# Altium PCB nrf52832_qfaa_nfc.PcbDoc
Units mil, origin at the board's own origin, x right, y up, seen from the top; angles counter-clockwise.
Board outline 999.98 x 2997 mil, 2 copper layers (Top Layer, Bottom Layer), stack 65.8 mil thick; 21 components, 46 nets, 92 pads, 60 vias.
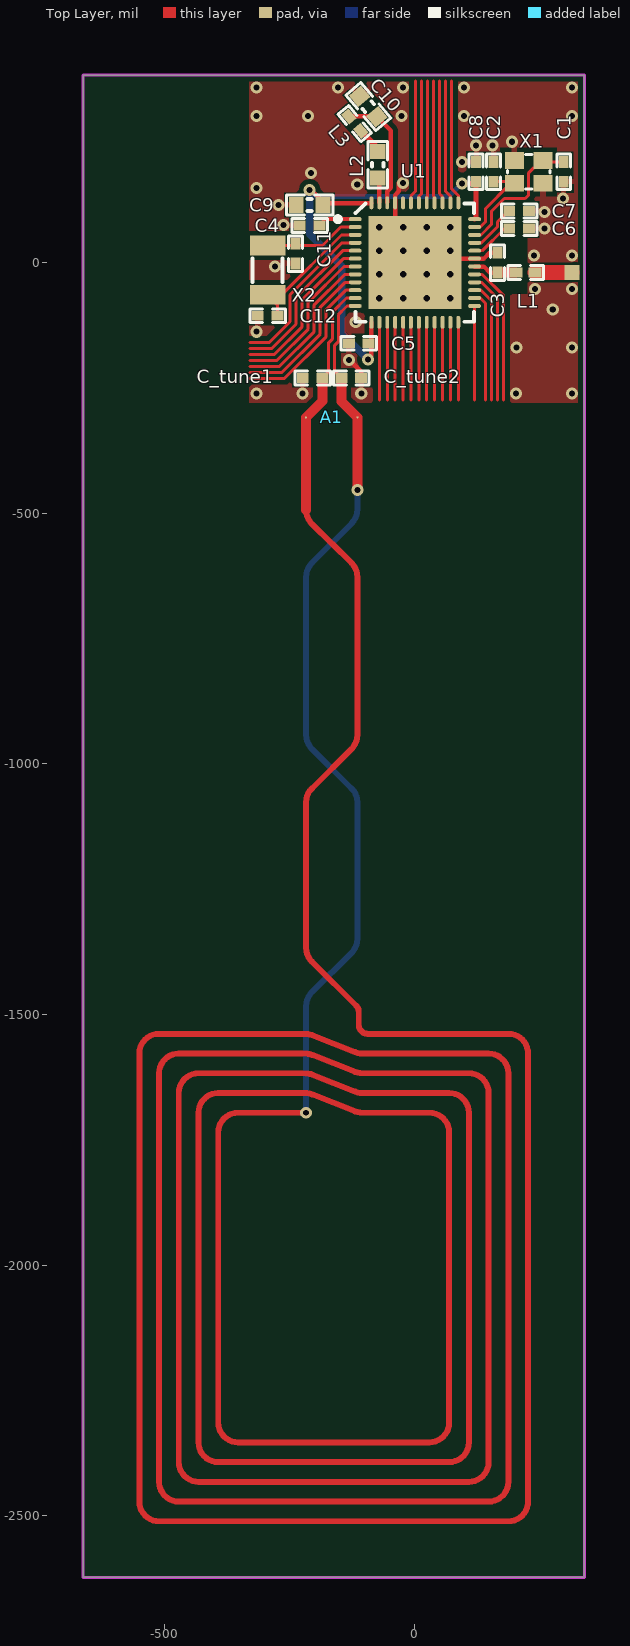
[diagram p0: Top Layer view]
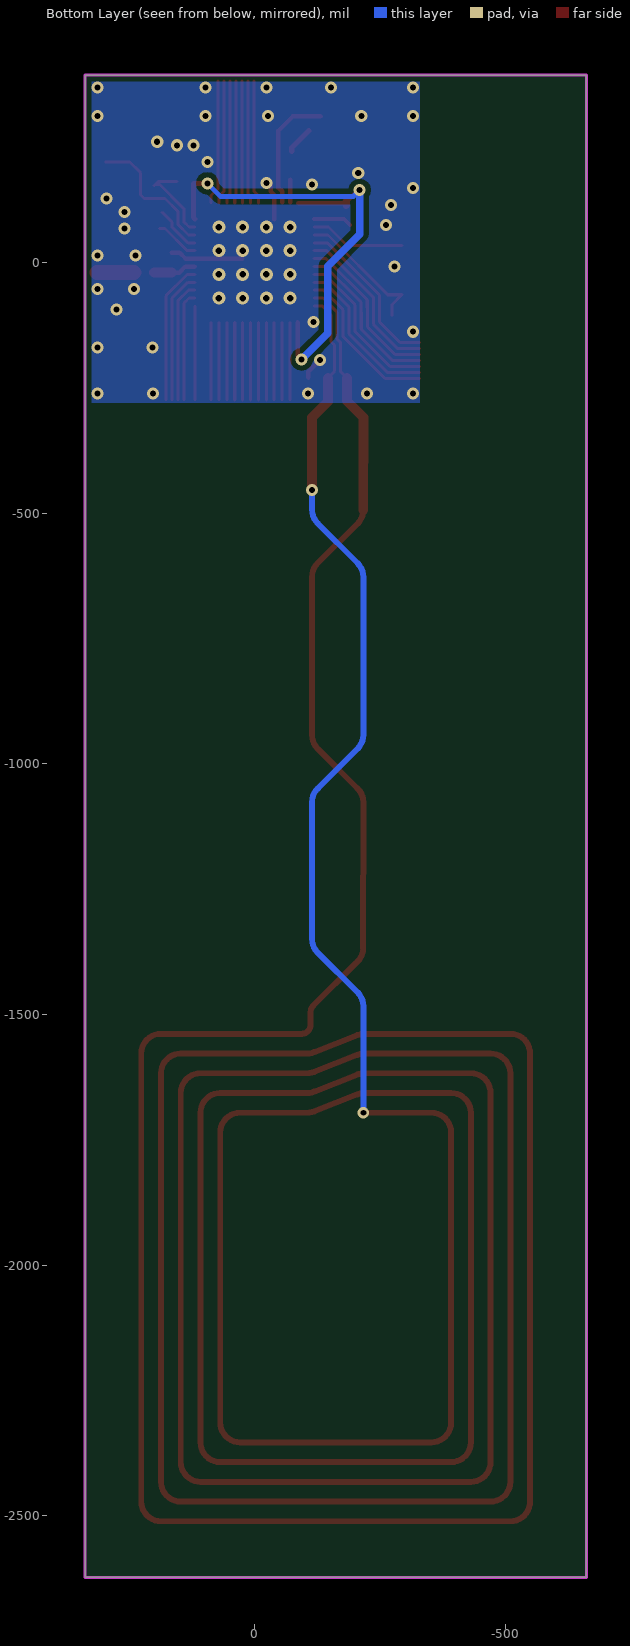
[diagram p1: Bottom Layer view, seen from below]
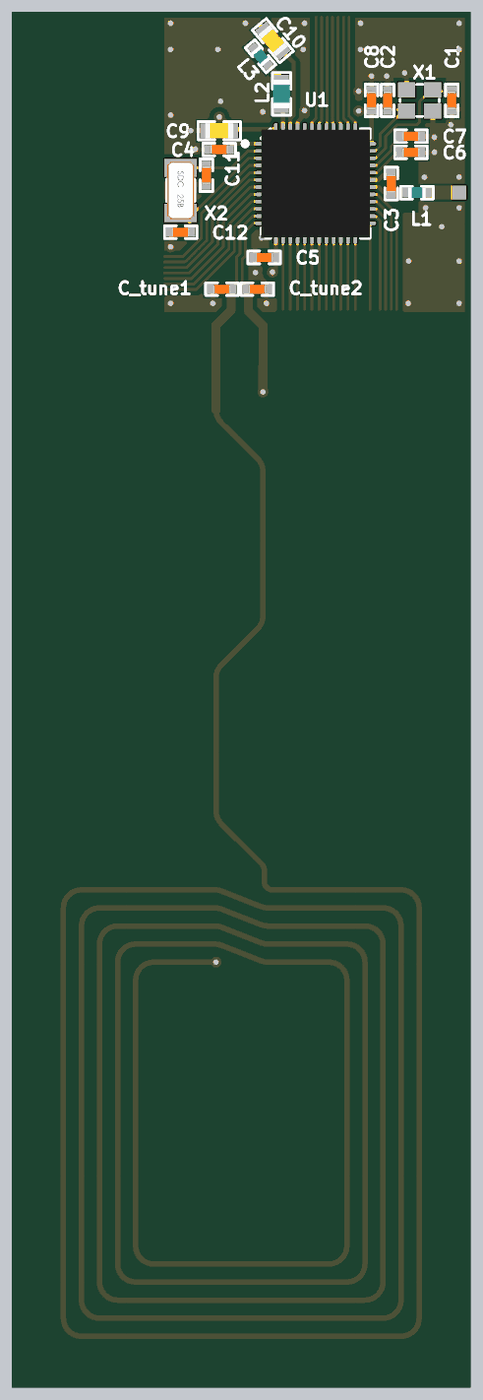
[diagram p2: 3D render of the assembled board from above, using the file's embedded part models]

## Layer stack, top to bottom
Top Solder: solder mask 0.4, Solder Resist, Dk 3.5
Top Layer: signal copper 1.4
Dielectric1: core 63, FR-4, Dk 4.8
Bottom Layer: signal copper 1.4
Bottom Solder: solder mask 0.4, Solder Resist, Dk 3.5

## Board outline
-662,-2623 337.98,-2623 337.98,374 -662,374

## Design rules (kind name [scope] priority, off if disabled: settings)
Clearance Polygon_ANT [(InNamedPolygon('Top_Layer-GND')) or (InNamedPolygon('Bottom_Layer-GND')) vs InNet('RF')] p1: gap=5
Clearance Polygon [(InNamedPolygon('Top_Layer-GND')) or (InNamedPolygon('Bottom_Layer-GND'))] p2: gap=10
Clearance [All] p3: gap=6
ComponentClearance [All] p1 off: gap=10 collisioncheckmode=3 verticalgap=10 showdistances=FALSE
FabricationTestPointUsage TestPointUsage [All] p1: valid=0 allowmultiple=FALSE
FabricationTestpoint Testpoint [All] p1: side=3 testpointundercomponent=TRUE minsize=40 maxsize=100 preferedsize=60 minholesize=0 maxholesize=40 preferedholesize=32 testpointgrid=1 allowsidetop=TRUE allowsidebottom=TRUE usegrid=TRUE gridtolerance=0.01
Height [All] p1 off: minheight=0 maxheight=1000 prefheight=500
HoleSize [All] p1: absolutevalues=TRUE maxlimit=160 minlimit=11.81 maxpercent=80.000 minpercent=20.000
MinimumAnnularRing [All] p1 off: minimumring=6
PolygonConnect PolygonConnect_1 [isVia and innet(gnd)] p1: connectstyle=Direct reliefconductorwidth=10 reliefentries=4 polygonreliefangle="90 Angle" airgapwidth=10
PolygonConnect [All] p2: connectstyle=Relief reliefconductorwidth=10 reliefentries=4 polygonreliefangle="90 Angle" airgapwidth=10
RoutingVias [All] p1: holewidth=16 width=32 viastyle="Through Hole" minholewidth=10 minwidth=10 maxholewidth=28 maxwidth=50
ShortCircuit ShortCircuit_NFC_ANT [InNet('NFC1') vs InNet('NFC2')] p1: allowed=TRUE
ShortCircuit [All] p2: allowed=FALSE
SilkToSolderMaskClearance SilkscreenOverComponentPads [IsPad] p1: minsilkscreentomaskgap=10 clearancetoexposedcopper=TRUE
SolderMaskExpansion [All] p1: expansion=3
Width [All] p1: maxlimit=100 minlimit=6 preferedwidth=6
23 further rules are at their usual default settings.

## Components (designator, comment, footprint, x,y, rotation, side; value= is the part's Value field where it differs from the comment)
A1 "NFC_ANT_Listener-6" NFC_ANT_Listener-6 -114.5,-309 r270 top
C1 "12pF" CAPC1005X04L 297,181 r270 top (schematic designator C7)
C2 "12pF" CAPC1005X04L 157,181 r90 top
C3 "0.8pF" CAPC1005X04L 165,0 r270 top (schematic designator C20)
C4 "100nF" CAPC1005X04L -210,74 r180 top (schematic designator C5)
C5 "100nF" CAPC1005X04L -112,-161 r180 top (schematic designator C6)
C6 "N.C." CAPC1005X04L 208,68 r180 top (schematic designator C8)
C7 "100pF" CAPC1005X04L 208,103 r0 top (schematic designator C11)
C8 "100nF" CAPC1005X04L 122,181 r90 top (schematic designator C12)
C9 "4.7µF" CAPC1608X06L -210,115 r180 top
C10 "1.0µF" CAPC1608X06L -92.97,311.2 r310 top (schematic designator C11)
C11 "12pF" CAPC1005X04L -238,18 r270 top
C12 "12pF" CAPC1005X04L -294,-106 r180 top
C_tune1 "TBD" CAPC1005X04L -204,-230 r180 top
C_tune2 "TBD" CAPC1005X04L -127,-230 r180 top
L1 "3.9nH" INDC1005X04L 221,-20 r0 top (schematic designator L2)
L2 "10µH" INDC1608X06L -74,195.2 r270 top (schematic designator L5)
L3 "15nH" INDC1005X04L -119.97,277.2 r310 top (schematic designator L6)
U1 "nRF52832-QFAA" QFN40P600X600X90-48N 0,0 r0 top locked
X1 "32MHz" BT-XTAL_2016 227,181 r180 top
X2 "32.768kHz" XTAL_3215 -294,-15 r270 top

## Footprints (in the part's own frame and the unit in brackets; to place one, negate y for a bottom-side part, rotate by r counter-clockwise, add the part's x,y. Pads: shape width x height; smd on the part's side, far side on the other; paste and mask are expansions set on the pad)
BT-XTAL_2016 [mm] "Crystal 2.0 x 1.6 mm"
  rect 0.95x0.85 smd: 1(-0.725,-0.575) 2(0.725,-0.575) 3(0.725,0.575) 4(-0.725,0.575)
  silkscreen extent -1.08,-0.88 1.08,0.88
CAPC1005X04L [mm] "Chip Capacitor, 2-Leads, Body 1.0x0.5mm, IPC High Density"
  rect 0.6x0.5 smd: 1(-0.5,0) 2(0.5,0)
  silkscreen extent -0.9,-0.35 0.9,0.35, body extent -0.51,-0.25 0.51,0.25, height 0.5
CAPC1608X06L [mm] "Chip Capacitor, 2-Leads, Body 1.6x0.8mm, IPC High Density"
  rect 0.75x0.8 smd: 1(-0.675,0) 2(0.675,0)
  silkscreen extent -1.17,-0.5 1.17,0.5, body extent -0.8,-0.43 0.8,0.43, height 0.8
INDC1005X04L [mm] "Chip Inductor, 2-Leads, Body 1.0x0.5mm, IPC High Density"
  rect 0.65x0.5 smd: 1(-0.475,0) 2(0.475,0)
  silkscreen extent -0.9,-0.35 0.9,0.35, body extent -0.5,-0.3 0.5,0.3, height 0.5
INDC1608X06L [mm] "Chip Inductor, 2-Leads, Body 1.6x0.8mm, IPC High Density"
  rect 0.75x0.8 smd: 1(-0.675,0) 2(0.675,0)
  silkscreen extent -1.18,-0.5 1.17,0.5, body extent -0.8,-0.48 0.8,0.48, height 0.8
NFC_ANT_Listener-6 [mm]
  round 0.1 smd paste-1 mask-1: 1(0,0) 2(0,-2.616)
  Top Layer lines w0.3: 35.23,-2.606 35.23,-6.056 ccw(c36.23,-6.056) 36.23,-7.056 50.93,-7.056 ccw(c50.93,-6.056) 51.93,-6.056 51.93,3.644 ccw(c50.93,3.644) 50.93,4.644 36.23,4.644 ccw(c36.23,3.644) 35.23,3.644 35.23,0.254 cw(c34.23,0.254) 35.157,-0.12 ; 4.68,-2.606 ccw(c4.68,-1.606) 5.387,-2.313 7.373,-0.298 cw(c8.08,-1.005) 8.08,-0.006 16.08,-0.006 ; 27.575,-2.31 cw(c26.874,-1.61) 26.874,-2.601 19.48,-2.606 cw(c19.48,-1.674) 18.822,-2.333 18.773,-2.284 16.787,-0.298 ccw(c16.08,-1.005) 16.08,-0.006 ; 27.575,-2.31 27.63,-2.256 29.796,-0.072 cw(c30.124,-0.4) 30.124,0.064 30.139,0.064 30.684,0.064 30.78,0.064 ccw(c30.78,0.514) 31.23,0.514 31.23,7.594 31.23,7.645 cw(c32.23,7.645) 32.23,8.644 54.93,8.644 cw(c54.93,7.645) 55.93,7.645 ; 34.157,-0.12 ccw(c33.23,0.254) 34.23,0.254 34.23,4.644 cw(c35.23,4.644) 35.23,5.644 51.93,5.644 cw(c51.93,4.644) 52.93,4.644 52.93,-7.056 cw(c51.93,-7.056) 51.93,-8.056 35.23,-8.056 cw(c35.23,-7.056) 34.23,-7.056 34.23,-2.665 34.23,-2.639 34.235,-2.569 34.244,-2.5 34.258,-2.432 34.276,-2.365 34.3,-2.299 35.161,-0.112 ; 33.157,-0.12 ccw(c32.23,0.254) 33.23,0.254 33.23,5.644 cw(c34.23,5.644) 34.23,6.644 52.93,6.644 cw(c52.93,5.644) 53.93,5.644 ; 32.157,-0.12 ccw(c31.23,0.254) 32.23,0.254 32.23,6.644 cw(c33.23,6.644) 33.23,7.644 53.93,7.644 ; 34.161,-0.112 33.3,-2.299 33.276,-2.365 33.258,-2.432 33.244,-2.5 33.235,-2.569 33.23,-2.639 33.23,-2.665 33.23,-8.056 ccw(c34.23,-8.056) 34.23,-9.056 52.93,-9.056 ccw(c52.93,-8.056) 53.93,-8.056 53.93,5.644 ; 33.161,-0.112 32.3,-2.299 32.276,-2.365 32.258,-2.432 32.244,-2.5 32.235,-2.569 32.23,-2.639 32.23,-2.665 32.23,-9.056 ccw(c33.23,-9.056) 33.23,-10.056 ; 32.161,-0.112 31.3,-2.299 31.276,-2.365 31.258,-2.432 31.244,-2.5 31.235,-2.569 31.23,-2.639 31.23,-2.665 31.23,-10.056 ccw(c32.23,-10.056) 32.23,-11.056 54.93,-11.056 ccw(c54.93,-10.056) 55.93,-10.056 55.93,7.644 ; 53.93,7.644 53.93,7.644 ; 33.23,-10.056 33.23,-10.056 ; 33.23,-10.056 53.93,-10.056 ccw(c53.93,-9.056) 54.93,-9.056 54.93,6.644 ccw(c53.93,6.644) 53.93,7.644 ; 16.08,-0.006 16.08,-0.006
  Top Layer lines w0.5: 0,-2.616 4.68,-2.606 ; 3.68,-0.006 0,0
  Bottom Layer lines w0.3: 35.23,-2.606 29.83,-2.606 cw(c29.83,-1.606) 29.123,-2.313 27.123,-0.299 ccw(c26.416,-1.006) 26.416,-0.006 ; 4.656,-0.006 cw(c4.656,-1.03) 5.38,-0.306 7.373,-2.313 ccw(c8.08,-1.606) 8.08,-2.606 ; 4.652,-0.006 3.68,-0.006 ; 8.08,-2.606 8.08,-2.606 ; 8.08,-2.606 16.08,-2.606 ccw(c16.08,-1.606) 16.787,-2.313 18.773,-0.327 18.822,-0.278 cw(c19.48,-0.937) 19.48,-0.006 26.416,-0.006 ; 26.416,-0.006 26.416,-0.006
QFN40P600X600X90-48N [mm] "QFN, 48-Leads, Body 6,0x6,0mm (max), Pitch 0,40mm, IPC Medium Density"
  oval 0.65x0.2 smd: 1(-3.025,2.2) 2(-3.025,1.8) 3(-3.025,1.4) 4(-3.025,1) 5(-3.025,0.6) 6(-3.025,0.2) 7(-3.025,-0.2) 8(-3.025,-0.6) 9(-3.025,-1) 10(-3.025,-1.4) 11(-3.025,-1.8) 12(-3.025,-2.2) 25(3.025,-2.2) 26(3.025,-1.8) 27(3.025,-1.4) 28(3.025,-1) 29(3.025,-0.6) 30(3.025,-0.2) 31(3.025,0.2) 32(3.025,0.6) 33(3.025,1) 34(3.025,1.4) 35(3.025,1.8) 36(3.025,2.2)
  oval 0.2x0.65 smd: 13(-2.2,-3.025) 14(-1.8,-3.025) 15(-1.4,-3.025) 16(-1,-3.025) 17(-0.6,-3.025) 18(-0.2,-3.025) 19(0.2,-3.025) 20(0.6,-3.025) 21(1,-3.025) 22(1.4,-3.025) 23(1.8,-3.025) 24(2.2,-3.025) 37(2.2,3.025) 38(1.8,3.025) 39(1.4,3.025) 40(1,3.025) 41(0.6,3.025) 42(0.2,3.025) 43(-0.2,3.025) 44(-0.6,3.025) 45(-1,3.025) 46(-1.4,3.025) 47(-1.8,3.025) 48(-2.2,3.025)
  rect 4.7x4.7 smd: 49(0,0)
  silkscreen extent -4.02,-3 3,3, body extent -3.02,-3.02 3.02,3.02, height 0.86
XTAL_3215 [mm] "XTAL SMD 3.2 x 1.5 mm"
  rect 1x1.8 smd: 1(-1.25,0) 2(1.25,0)
  silkscreen extent -0.6,-0.75 0.6,0.75, body extent -1.6,-0.75 1.6,0.75, height 0.81

## Part data
A1: "NFC Antenna Listener-6"
C1 C2 C11 C12: library part C0402-12p, "Capacitor, NP0, ±2%"
C3: library part C0402-0.8p, "Capacitor, NP0, ±5%"
C4 C5 C8: library part C0402-100n, "Capacitor, X7R, ±10%"
C6: library part C0402-N.C., "Not mounted"
C7: library part C0402-100p, "Capacitor, NP0, ±5%"
C9: library part C0603-4µ7, "Capacitor, X5R, ±10%"
C10: library part C0603-1µ0, "Capacitor, X7R, ±10%"
C_tune1 C_tune2: library part C0402-TBD, "Chip Cap 0402"
L1: library part L0402-3n9, "High frequency chip inductor ±5%"
L2: library part L0603-10µ, "Chip inductor, IDC,min = 50 mA, ±20%"
L3: library part L0402-15n, "High frequency chip inductor ±10%"
U1: "Multi-protocol Bluetooth Low Energy and 2.4GHz proprietary system-on-chip"
X1: library part XTAL_SMD2016_32MHz_8pF_Epson, "XTAL SMD 2016, 32MHz, Cl=8pF, Total Tol: ±40ppm"
X2: library part "XTAL_FC-135 32.768k", "XTAL SMD 3215, 32.768kHz, 9pF, ±20ppm"

## Free pads (board coordinates)
  rect 30x30 smd: 0(313.74,-19.75)

## Via types
v1: diameter 24, hole 12, Top Layer to Bottom Layer, tented both sides, 42 vias
v2: diameter 25.98, hole 12.99, Top Layer to Bottom Layer, tented both sides, 16 vias
v3: diameter 23.62, hole 11.81, Top Layer to Bottom Layer, tented both sides, 2 vias

## Nets (pads, with @x,y where several pads share a name; then routed paths per layer and width w, separated by ;. In a path a pad name is that pad's centre, name@x,y a point inside that pad or via, vN(x,y) a via of type N, cw(c..) or ccw(c..) an arc to the next point about the centre after c; other vN are vias at no path point)
DEC1: C4.1 U1.1 | length 76
  Top Layer w8: C4.1@-190.16,74.76 -178.31,86.61 U1.1
DEC2: C6.2 U1.32 | length 88.3
  Top Layer w6: U1.32 134.3,23.62 178.67,68 C6.2@189,68
DEC3: C7.1 U1.33 | length 96
  Top Layer w6: U1.33 133.07,39.37 165,71.3 165,81.19 C7.1@184.06,100.25
DEC4: C10.2 L3.1 U1.46 | length 240.7
  Top Layer w9: L3.1 C10.2@-76.57,291.53 ; C10.2 -47.75,262.7 -47.75,149.52 -55.12,142.15 U1.46@-55.12,120.3
GND: C1.2 C2.2 C3.1 C4.2 C5.2 C6.1 C7.2 C8.2 C9.2 C10.1 C11.2 C12.2 C_tune1.2 C_tune2.1 U1.31 U1.45 U1.49 X1.2 X1.4 | length 266.9
  Top Layer w9: v1(-131,-194) -107.32,-217.69 C_tune2.1 ; U1.49@-39.37,86.61 U1.45 -39.37,134.63 -32,142 v1@-32,159 ; U1.49@24.31,8 137.77,8 149.06,19.3 C3.1@165.31,19.3
  other v1: -316,-261 -224,-261 -107,-261 202,-261 313,-261 203,-169 313,-169 -316,-138 -118,-118.11 275,-94 240,-53 313,-53 -279,-8 237.16,13.76 313,14 259,68 -262,75 259,101 -272,115 295,128 -316,149 -115,156 -24,159 -207,179 94,201 122,234 155,234 194,241 -316,292 -213,292 -27,292 98,292 313,292 -316,349 -153,349 -24,349 98,349 313,349
  other v2: -70.87,-70.87 -23.62,-70.87 23.62,-70.87 70.87,-70.87 -70.87,-23.62 -23.62,-23.62 23.62,-23.62 70.87,-23.62 -70.87,23.62 -23.62,23.62 23.62,23.62 70.87,23.62 -70.87,70.87 -23.62,70.87 23.62,70.87 70.87,70.87
NetC3_2: C3.2 L1.1 U1.30 | length 86.6
  Top Layer w9: U1.30 137.79,-7.87 149.99,-20.07 C3.2@165.32,-20.07
  Top Layer w20: C3.2@165,-19.87 L1.1@200.31,-19.87
NetL2_1: L2.1 L3.2 | length 55.2
  Top Layer w11: L3.2 -74,228.92 L2.1
NetL2_2: L2.2 U1.47 | length 45.2
  Top Layer w9: U1.47@-70.87,120.3 L2.2@-70.87,165.49
NFC1: A1.2 C_tune1.1 U1.11 | length 289
  Top Layer w6: C_tune1.1@-184.01,-230.01 -172,-218 -172,-159.97 -164.85,-152.82 -164.85,-144 -164.85,-99.25 -136.47,-70.87 U1.11
  Top Layer w19.68: A1.2 -184.32,-275.82 C_tune1.1
NFC2: A1.1 C_tune2.2 U1.12 | length 267.6
  Top Layer w6: C_tune2.2 -160,-216.69 -160,-165 -152.85,-157.85 -152.85,-104.22 -135.25,-86.61 U1.12
  Top Layer w19.69: C_tune2.2 -146.69,-276.81 A1.1
  other v3: -217.08,-1696.02 -114.72,-453.89
P0.00/XL1: C11.1 U1.2 X2.1 | length 190.1
  Top Layer w6: X2.1 -184.36,34.21 -147.71,70.87 U1.2
P0.01/XL2: C12.1 U1.3 X2.2 | length 274.3
  Top Layer w6: C12.1 -274.32,-83.9 X2.2 -265.82,-64.21 -146.49,55.12 U1.3
P0.02/AIN0: U1.4 | length 323.5
  Top Layer w6: -329,-159 -290,-159 -249,-118 -249,-64.39 -145.24,39.37 U1.4
P0.03/AIN1: U1.5 | length 321.9
  Top Layer w6: -329,-171 -285.03,-171 -236.98,-122.95 -236.98,-69.37 -143.98,23.62 U1.5
P0.04/AIN2: U1.6 | length 320.3
  Top Layer w6: -329,-183 -280.06,-183 -224.98,-127.92 -224.98,-91.02 -224.96,-74.35 -142.73,7.87 U1.6
P0.05/AIN3: U1.7 | length 318.7
  Top Layer w6: -329,-195 -275.09,-195 -212.98,-132.89 -212.98,-100.12 -212.85,-100 -212.85,-79.37 -141.36,-7.87 U1.7
P0.06: U1.8 | length 317.2
  Top Layer w6: -329,-207 -270,-207 -200.85,-137.85 -200.85,-84.34 -140.14,-23.62 U1.8
P0.07: U1.9 | length 315.7
  Top Layer w6: -329,-219 -265,-219 -188.85,-142.85 -188.85,-89.31 -138.92,-39.37 U1.9
P0.08: U1.10 | length 314.1
  Top Layer w6: -329,-231 -260,-231 -176.85,-147.85 -176.85,-94.28 -137.7,-55.12 U1.10
P0.11: U1.14 | length 154.9
  Top Layer w6: -70.87,-274 U1.14
P0.12: U1.15 | length 154.9
  Top Layer w6: -55.12,-274 U1.15
P0.13: U1.16 | length 154.9
  Top Layer w6: -39.37,-274 U1.16
P0.14: U1.17 | length 154.9
  Top Layer w6: -23.62,-274 U1.17
P0.15: U1.18 | length 154.9
  Top Layer w6: -7.87,-274 U1.18
P0.16: U1.19 | length 154.9
  Top Layer w6: 7.87,-274 U1.19
P0.17: U1.20 | length 154.9
  Top Layer w6: 23.62,-274 U1.20
P0.18: U1.21 | length 154.9
  Top Layer w6: 39.37,-274 U1.21
P0.19: U1.22 | length 154.9
  Top Layer w6: 55.12,-274 U1.22
P0.20: U1.23 | length 154.9
  Top Layer w6: 70.87,-274 U1.23
P0.21: U1.24 | length 154.9
  Top Layer w6: 86.61,-274 U1.24
P0.22: U1.27 | length 240.2
  Top Layer w6: U1.27 131.85,-55.12 152.89,-76.16 152.89,-273.81
P0.23: U1.28 | length 261.6
  Top Layer w6: U1.28 133.07,-39.37 165,-71.3 165,-273.81
P0.24: U1.29 | length 283.1
  Top Layer w6: U1.29 134.3,-23.62 177,-66.33 177,-273.81
P0.25: U1.37 | length 248.5
  Top Layer w6: 73,362 73,147.22 86.61,133.61 U1.37
P0.26: U1.38 | length 247
  Top Layer w6: 61,362 61,142.25 70.87,132.39 U1.38
P0.27: U1.39 | length 245.4
  Top Layer w6: 49,362 49,137.28 55.12,131.16 U1.39
P0.28/AIN4: U1.40 | length 243.9
  Top Layer w6: 37,362 37,132.31 39.37,129.94 U1.40
P0.29/AIN5: U1.41 | length 243.5
  Top Layer w6: U1.41 23.62,130.71 25,132.09 25,362
P0.30/AIN6: U1.42 | length 245
  Top Layer w6: U1.42 7.87,131.93 13,137.06 13,362
P0.31/AIN7: U1.43 | length 246.6
  Top Layer w6: U1.43 -7.87,133.16 1,142.03 1,362
RF: L1.2 pad.0 | length 73.7
  Top Layer w30: L1.2@240.02,-19.75 pad.0
SWDCLK: U1.25 | length 187.2
  Top Layer w6: 119.09,-273.81 U1.25
SWDIO: U1.26 | length 218.7
  Top Layer w6: U1.26 130.5,-70.87 140.89,-81.26 140.89,-273.81
VDD_NRF: C5.1 C8.1 C9.1 U1.13 U1.36 U1.48 | length 1026.3
  Top Layer w9: v1(-209.84,144.76) -206.58,144.76 -183.27,121.46 -179.92,118.11 U1.48@-87,118.11 ; v1(-94,-193) -86.61,-185.61 U1.13
  Top Layer w10: v1(94,158) 94.68,157.31 122,157.31 122,89.52 U1.36
  Top Layer w15: C9.1@-183.27,114.76 C9.1@-183.27,121.46 ; v1@-96.9,-193 v1(-94,-193)
  Bottom Layer w10: v1(-209.84,144.76) -197.08,132 68,132 v1(94,158)
  Bottom Layer w15: v1(-209.84,144.76) -209.84,56.66 -145.95,-7.24 -145.95,-141.05 v1(-94,-193)
XC1: C1.1 U1.34 X1.1 | length 279.4
  Top Layer w6: U1.34 131.85,55.12 152.89,76.16 152.89,102.47 178.42,128 220,128 227,135 227,179 248.68,200.68 C1.1
XC2: C2.1 U1.35 X1.3 | length 178.3
  Top Layer w6: U1.35 130.5,70.87 140.89,81.26 140.89,107.44 189.45,156 X1.3@197.98,156 ; C2.1@155,161.31 192.66,161.31 X1.3@200.54,153.44
pads on no net: U1.44

## Polygon pours and split planes (outlines as drawn)
GND on Top Layer "Top_Layer-GND" (solid, remove dead copper, pour order 1000): -353,410 -353,-307 363,-307 363,410
GND on Bottom Layer "Bottom_Layer-GND" (solid, remove dead copper, pour order 1001): -373,400 -373,-309 394,-309 394,400

## Keep-outs
Keep-Out Layer:
  the board outline again, w6

## Other copper
Top Layer:
  pour cut-out: 225,-63 117,-63 117,51 225,51
  pour cut-out: -670,-300 -330,-300 -330,410 -670,410
  pour cut-out: -670,-280 350,-280 350,-2650 -670,-2650
Bottom Layer:
  pour cut-out: -670,-300 -330,-300 -330,410 -670,410
  pour cut-out: -670,-280 350,-280 350,-2650 -670,-2650

## Silkscreen, mask and mechanical layers (free items; w line width, h text height)
Mechanical 1:
  the board outline again, w6

## Dimensions
-662,-2623 to 337.98,-2623 on Mechanical 3
337.98,374 to 337.98,-2623 on Mechanical 3